# Altium PCB pcbTUESDAY.PcbDoc
Units mil, origin at the board's own origin, x right, y up, seen from the top; angles counter-clockwise.
Board outline 1620 x 1650 mil, 2 copper layers (Top Layer, Bottom Layer); 30 components, 22 nets, 99 pads, 0 vias.
Unrouted connection lines stored in the file: 28.
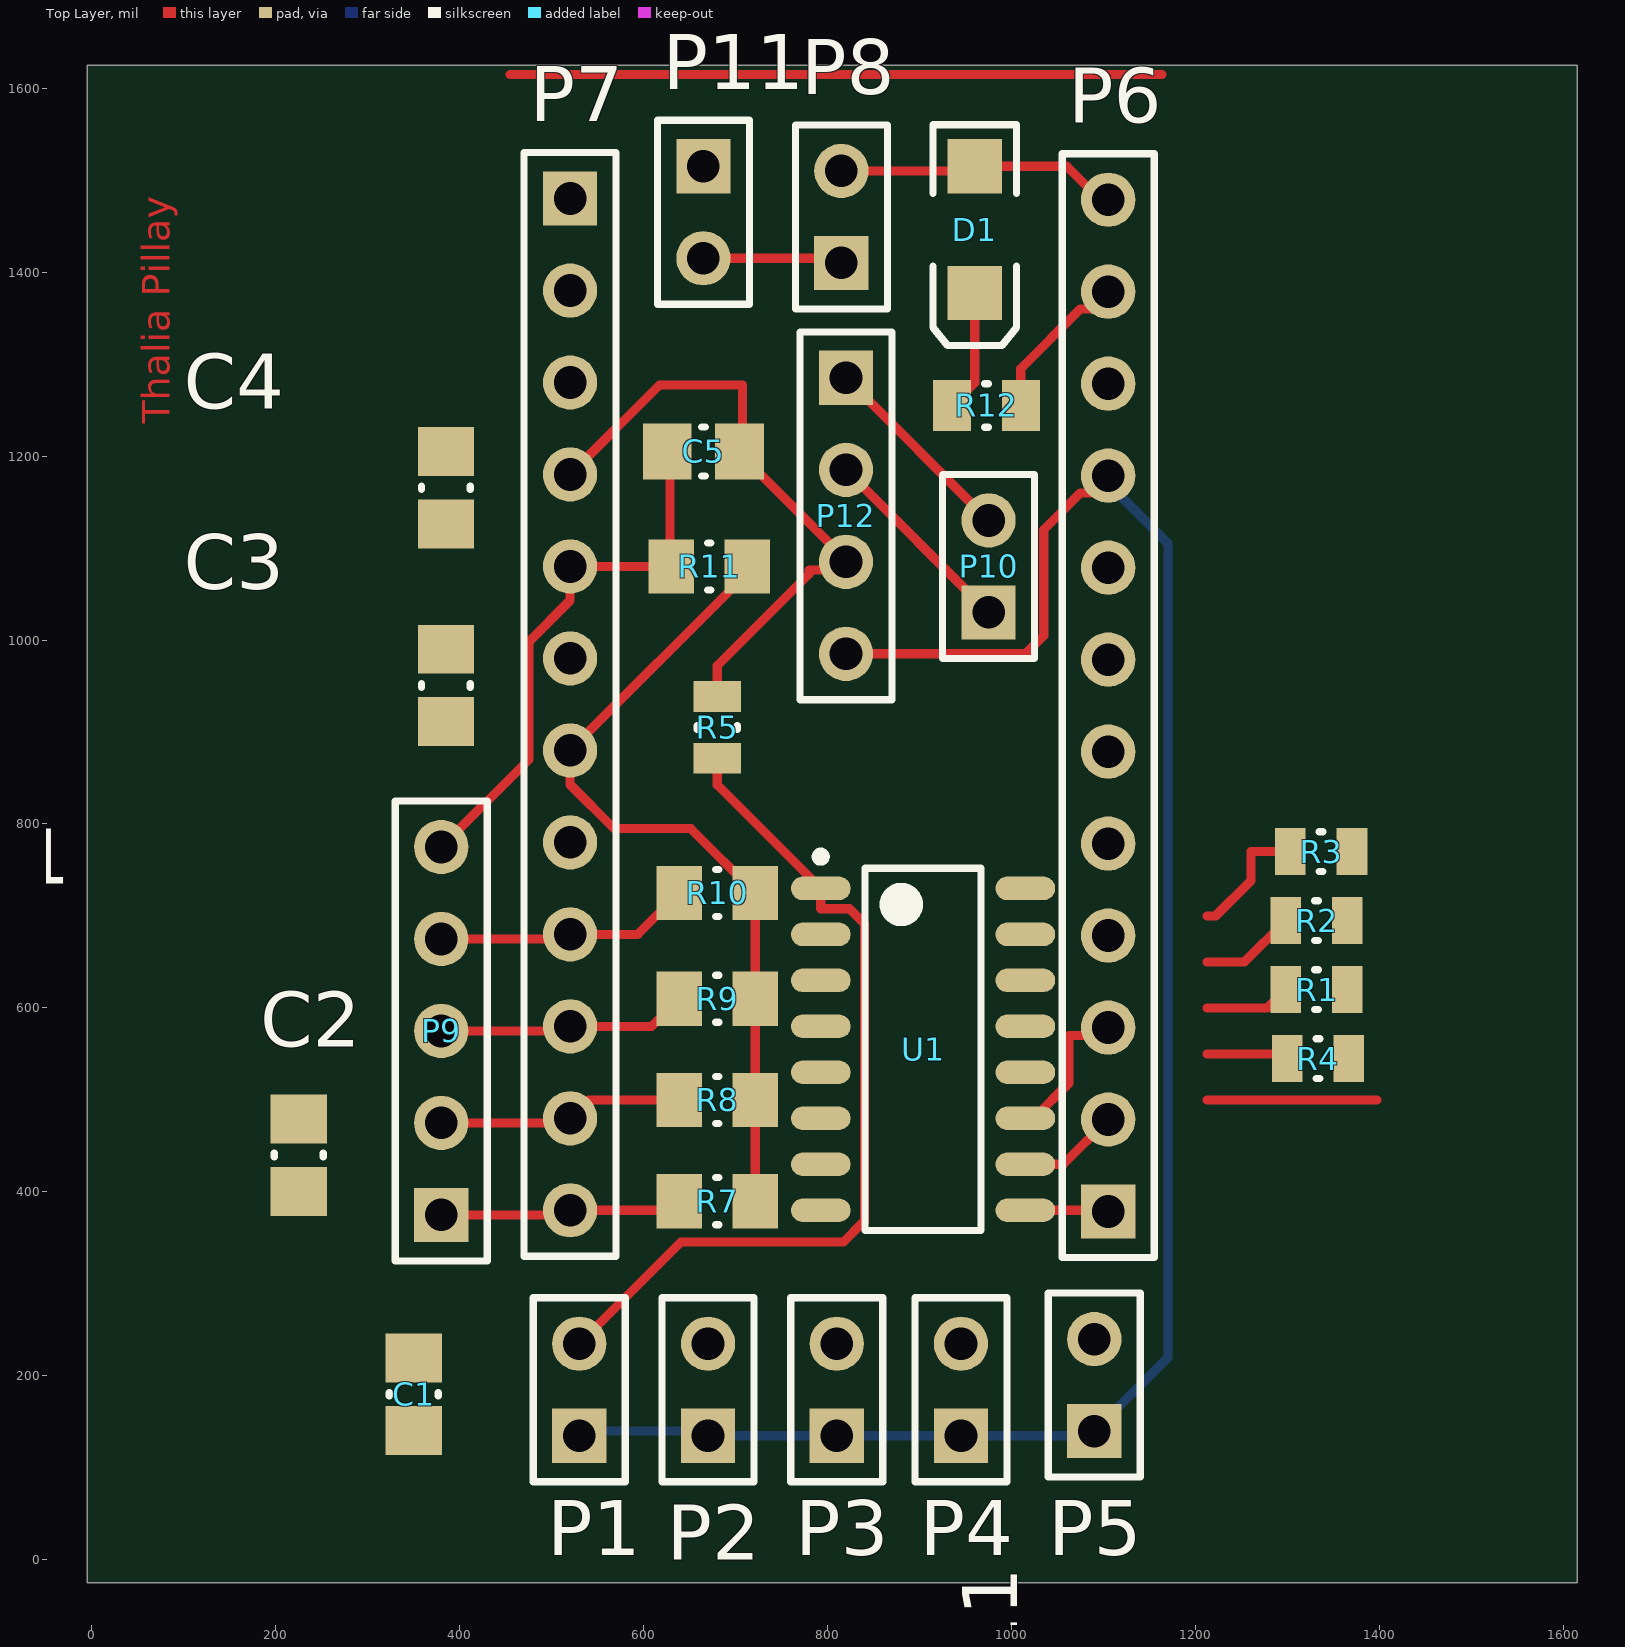
[diagram p0: Top Layer view]
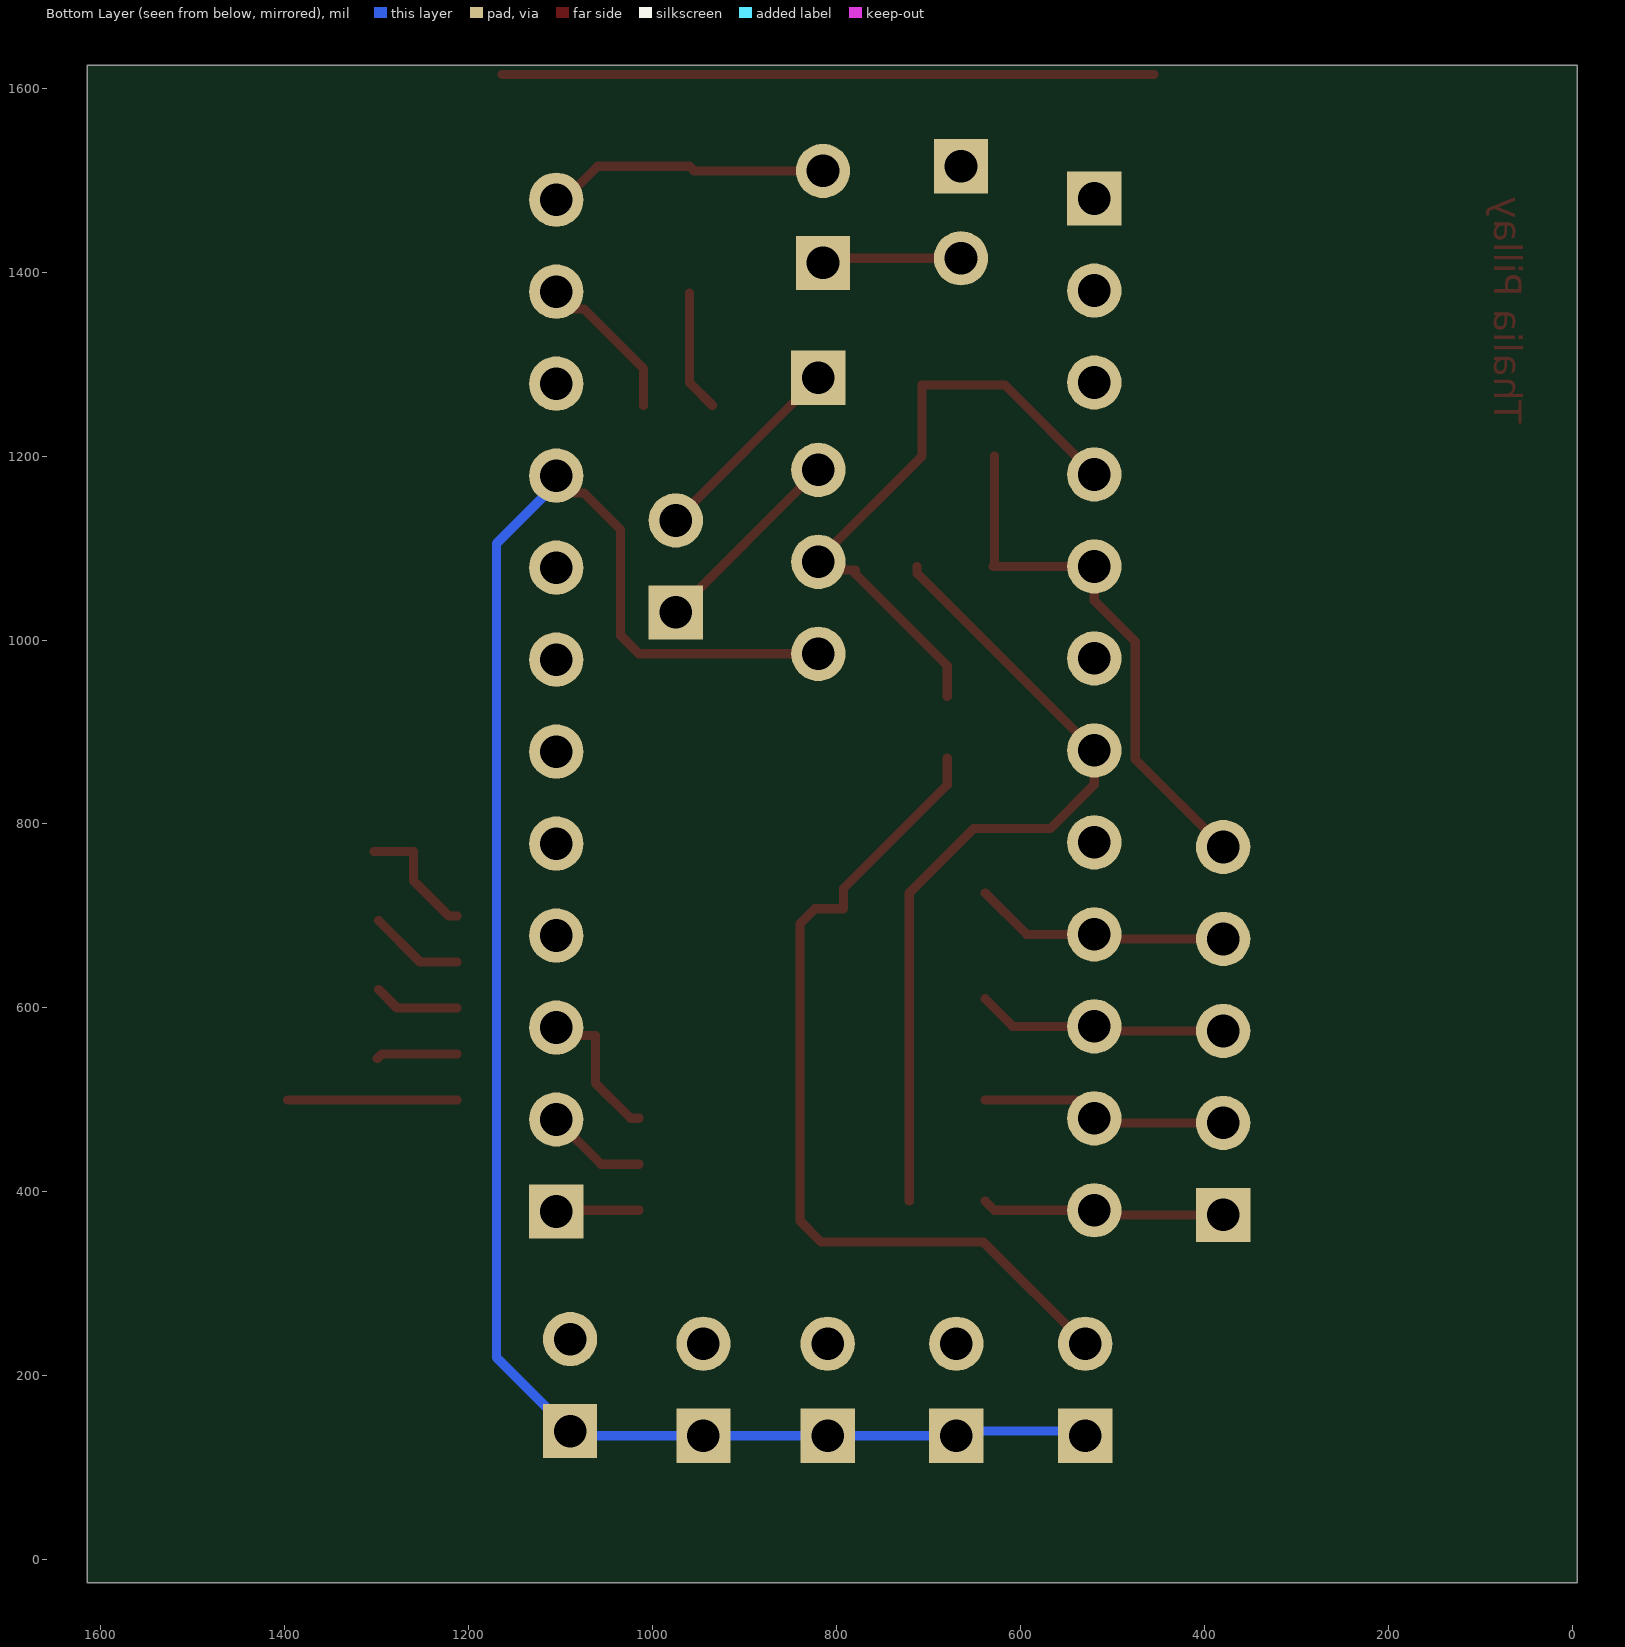
[diagram p1: Bottom Layer view, seen from below]

## Layer stack, top to bottom
Top Solder: solder mask 0.4, Solder Resist, Dk 3.5
Top Layer: signal copper 1.4
Dielectric 1: dielectric 12.6, FR-4, Dk 4.8
Bottom Layer: signal copper 1.4
Bottom Solder: solder mask 0.4, Solder Resist, Dk 3.5

## Board outline
-5,-25 1615,-25 1615,1625 -5,1625

## Design rules (kind name [scope] priority, off if disabled: settings)
Clearance [All] p1: gap=10 ignorepadtopadclearanceinfootprint=FALSE except(0: Arc-Hole Track-Hole SMDPad-Hole THPad-Hole Via-Hole Fill-Hole Poly-Hole Region-Hole Text-Hole)
PolygonConnect [All] p1: connectstyle=Relief reliefconductorwidth=10 reliefentries=4 polygonreliefangle="90 Angle" airgapwidth=10
RoutingVias [All] p1: holewidth=28 width=50 viastyle="Through Hole" minholewidth=28 minwidth=50 maxholewidth=28 maxwidth=50
SolderMaskExpansion [All] p1: expansion=4
Width [All] p1: maxlimit=10 minlimit=10 preferedwidth=10
30 further rules are at their usual default settings.

## Components (designator, comment, footprint, x,y, rotation, side; value= is the part's Value field where it differs from the comment)
C1 "CAP 100pF 10V 0805(2012)" CAPC0805(2012)100_M 350,180 r90 top value=100pF
C2 "CAP 100pF 10V 0805(2012)" CAPC0805(2012)100_M 225,440 r90 top value=100pF
C3 "CAP 100pF 10V 0805(2012)" CAPC0805(2012)100_M 385,950.63 r90 top value=100pF
C4 "CAP 100pF 10V 0805(2012)" CAPC0805(2012)100_M 385,1165.63 r270 top value=100pF
C5 "CAP 100pF 10V 0805(2012)" CAPC0805(2012)100_M 665,1205 r180 top value=100pF
D1 "GREEN" 3.2X1.6X1.1 960,1446.1 r270 top (schematic designator D?)
P1 "pinky" HDR1X2 530,135 r90 top
P2 "ring" HDR1X2 670,135 r90 top
P3 "middle" HDR1X2 810,135 r90 top
P4 "index" HDR1X2 945,135 r90 top
P5 "thumb" HDR1X2 1090,140 r90 top
P6 "Header 12" HDR1X12 1105,378.74 r90 top
P7 "Header 12" HDR1X12 520,1480 r270 top
P8 "TOGGLE" HDR1X2 815,1410 r90 top
P9 "Header 5" HDR1X5 380,375 r90 top
P10 "IMU HEADER" HDR1X2 975,1030 r90 top
P11 "BATTERY" HDR1X2 665,1515 r270 top
P12 "ADAFRUIT BNO055" HDR1X4 820,1285 r270 top
R1 "47K 5% 0805(2012)" RESC0805(2012)_L 1331.54,620 r180 top value="47000.00 Ohm"
R2 "47K 5% 0805(2012)" RESC0805(2012)_L 1331.54,695 r180 top value="47000.00 Ohm"
R3 "47K 5% 0805(2012)" RESC0805(2012)_L 1336.54,770 r180 top value="47000.00 Ohm"
R4 "47K 5% 0805(2012)" RESC0805(2012)_L 1333.07,545 r180 top value="47000.00 Ohm"
R5 "47K 5% 0805(2012)" RESC0805(2012)_L 680,905 r270 top value="47000.00 Ohm"
R7 "10M 5% 0805(2012)" RESC0805(2012)_M 680,390 r0 top value="10000000.00 Ohm"
R8 "10M 5% 0805(2012)" RESC0805(2012)_M 680,500 r0 top value="10000000.00 Ohm"
R9 "10M 5% 0805(2012)" RESC0805(2012)_M 680,610 r0 top value="10000000.00 Ohm"
R10 "10M 5% 0805(2012)" RESC0805(2012)_M 680,725 r0 top value="10000000.00 Ohm"
R11 "10M 5% 0805(2012)" RESC0805(2012)_M 671.34,1080 r0 top value="10000000.00 Ohm"
R12 "240R 5% 0805(2012)" RESC0805(2012)_N 972.6,1255 r180 top value="240.00 Ohm"
U1 "CD4051BM96G3" D0016A_M 903.78,555 r0 top

## Footprints (in the part's own frame and the unit in brackets; to place one, negate y for a bottom-side part, rotate by r counter-clockwise, add the part's x,y. Pads: shape width x height; smd on the part's side, far side on the other; paste and mask are expansions set on the pad)
3.2X1.6X1.1 [mm] "SMT LED; 2 Flat Leads"
  rect 1.5x1.5 smd: 1(-1.75,0) 2(1.75,0)
  silkscreen extent -2.9,-1.15 3.2,1.15
CAPC0805(2012)100_M [mm] "Chip Capacitor, Body 2.0x1.2mm, Height 1.0mm, IPC Low Density"
  rect 1.35x1.55 smd: 1(-1,0) 2(1,0)
  silkscreen extent -0.05,-0.67 0.05,0.67, body extent -1.1,-0.72 1.1,0.72, height 1
D0016A_M [mm] "SOIC, 16-Leads, Body 10x4mm, Pitch 1.27mm, IPC Low Density"
  oval 1.65x0.65 smd: 1(-2.825,4.445) 2(-2.825,3.175) 3(-2.825,1.905) 4(-2.825,0.635) 5(-2.825,-0.635) 6(-2.825,-1.905) 7(-2.825,-3.175) 8(-2.825,-4.445) 9(2.825,-4.445) 10(2.825,-3.175) 11(2.825,-1.905) 12(2.825,-0.635) 13(2.825,0.635) 14(2.825,1.905) 15(2.825,3.175) 16(2.825,4.445)
  silkscreen extent -2.95,-5 1.6,5.44, body extent -3,-4.95 3,4.95, height 1.59
HDR1X2 [mm] "Connector; Header; 2 Position"
  rect 1.5x1.5 hole 0.9: 1(0,0)
  round 1.5 hole 0.9: 2(2.54,0)
  silkscreen extent -1.27,-1.27 3.81,1.27
HDR1X4 [mm] "Connector; Header; 4 Position"
  rect 1.5x1.5 hole 0.9: 1(0,0)
  round 1.5 hole 0.9: 2(2.54,0) 3(5.08,0) 4(7.62,0)
  silkscreen extent -1.27,-1.27 8.89,1.27
HDR1X5 [mm] "Connector; Header; 5 Position"
  rect 1.5x1.5 hole 0.9: 1(0,0)
  round 1.5 hole 0.9: 2(2.54,0) 3(5.08,0) 4(7.62,0) 5(10.16,0)
  silkscreen extent -1.27,-1.27 11.43,1.27
HDR1X12 [mm] "Connector; Header; 12 Position"
  rect 1.5x1.5 hole 0.9: 1(0,0)
  round 1.5 hole 0.9: 2(2.54,0) 3(5.08,0) 4(7.62,0) 5(10.16,0) 6(12.7,0) 7(15.24,0) 8(17.78,0) 9(20.32,0) 10(22.86,0) 11(25.4,0) 12(27.94,0)
  silkscreen extent -1.27,-1.27 29.21,1.27
RESC0805(2012)_L [mm] "Chip Resistor, Body 2.0x1.3mm, IPC High Density"
  rect 0.85x1.3 smd: 1(-0.85,0) 2(0.85,0)
  silkscreen extent -0.05,-0.55 0.05,0.55, body extent -1.1,-0.67 1.1,0.68, height 0.7
RESC0805(2012)_M [mm] "Chip Resistor, Body 2.0x1.3mm, IPC Low Density"
  rect 1.25x1.5 smd: 1(-1.05,0) 2(1.05,0)
  silkscreen extent -0.05,-0.65 0.05,0.65, body extent -1.1,-0.67 1.1,0.67, height 0.7
RESC0805(2012)_N [mm] "Chip Resistor, Body 2.0x1.3mm, IPC Medium Density"
  rect 1.05x1.4 smd: 1(-0.95,0) 2(0.95,0)
  silkscreen extent -0.05,-0.6 0.05,0.6, body extent -1.1,-0.67 1.1,0.68, height 0.7

## Part data
C1 C2 C3 C4 C5: library part CMP-1036-01932-1, "CAP 100pF 10V ±5% 0805 (2012 Metric) Thickness 1mm SMD", Case-EIA=0805, Case-Metric=2012, Rated Voltage="10 V", Tolerance=±5%, Max Thickness="1 mm", Technology=SMT
D1: library part LED2, "Typical RED, GREEN, YELLOW, AMBER GaAs LED", LatestRevisionDate=17-Jul-2002, LatestRevisionNote="Re-released for DXP Platform.", PackageDescription="SM LED; 2 Flat Leads", PackageReference=3.2X1.6X1.1, PackageVersion=Feb-2002, Published=8-Jun-2000, Publisher="Altium Limited"
P1 P2 P3 P4 P5 P8 P10 P11: library part "Header 2", "Header, 2-Pin", LatestRevisionDate=17-Jul-2002, LatestRevisionNote="Re-released for DXP Platform.", Publisher="Altium Limited"
P6 P7: "Header, 12-Pin", LatestRevisionDate=17-Jul-2002, LatestRevisionNote="Re-released for DXP Platform.", Publisher="Altium Limited"
P9: "Header, 5-Pin", LatestRevisionDate=17-Jul-2002, LatestRevisionNote="Re-released for DXP Platform.", Publisher="Altium Limited"
P12: library part "Header 4", "Header, 4-Pin", LatestRevisionDate=17-Jul-2002, LatestRevisionNote="Re-released for DXP Platform.", Publisher="Altium Limited"
R1 R2 R3 R4 R5: library part CMP-1013-00114-1, "47K 0.125W 5% 0805 (2012 Metric)  SMD", Case-EIA=0805, Case-Metric=2012, Power="0.125 W", Tolerance="5 %", Technology=SMT
R7 R8 R9 R10 R11: library part CMP-1013-00170-1, "10M 0.125W 5% 0805 (2012 Metric)  SMD", Case-EIA=0805, Case-Metric=2012, Power="0.125 W", Tolerance="5 %", Technology=SMT
R12: library part CMP-1013-00059-1, "240R 0.125W 5% 0805 (2012 Metric)  SMD", Case-EIA=0805, Case-Metric=2012, Power="0.125 W", Tolerance="5 %", Technology=SMT
U1: library part CMP-1575-00039-2, "CMOS Single 8-Channel Analog Multiplexer/Demultiplexer with Logic-Level Conversion, D0016A, LARGE T&R", Operating Temperature Range(C)="-55 to 125", Part Number=CD4051B, Rating=Military, Bandwidth(Max)(MHz)=20, Code_IPC="MS-012 variation AC", ComponentLink1Description="Manufacturer URL", ComponentLink1URL=http://www.ti.com/, ComponentLink2Description=Datasheet, ComponentLink2URL=http://www.ti.com/lit/ds/symlink/cd4051b.pdf, Configuration="1 X 1:8 MUX", Crosstalk=Yes, DatasheetVersion=SCHS047G, ICC(Typ)(mA)=0.00008, Output Drive (IOL/IOH)(Max)(mA)=1, Output Type=CMOS, PackageReference=D0016A, PackageVersion=http://www.ti.com/lit/ml/mpds178g/mpds178g.pdf, PartNumber=CD4051BM96G3, Ron(Max)(Ohms)=240, Ron(Typ)(Ohms)=125, VCC(Max)(V)=18, VCC(Min)(V)=5

## Nets (pads, with @x,y where several pads share a name; then routed paths per layer and width w, separated by ;. In a path a pad name is that pad's centre, name@x,y a point inside that pad or via, vN(x,y) a via of type N, cw(c..) or ccw(c..) an arc to the next point about the centre after c; other vN are vias at no path point)
A0: P6.5 U1.3
A4: P10.1 P12.2 | length 219.2
  Top Layer w10: P12.2 P10.1
A5: P10.2 P12.1 | length 219.2
  Top Layer w10: P12.1 P10.2
GND: C1.1 C2.1 C3.1 C4.1 C5.1 P6.11 P7.4 P11.1 P12.3 R1.1 R2.1 R3.1 R4.1 R5.1 R12.1 U1.6 U1.7 U1.8 | length 859.3
  Top Layer w10: P7.4 617.4,1277.4 707.4,1277.4 707.4,1200 820,1087.4 P12.3 811.17,1076.17 780,1076.17 780,1071.98 680,971.98 R5.1 ; R12.1 1010,1295 1075,1360 1086.26,1360 P6.11
NetD?_2: D1.2 R12.2 | length 132.5
  Top Layer w10: R12.2 960,1279.8 D1.2
NetP1_2: P1.2 R5.2 U1.1 | length 952.9
  Top Layer w10: P1.2 640.47,345.47 817.02,345.47 840.04,368.49 840.04,691.51 823.76,707.8 792.56,707.8 U1.1 680,842.56 R5.2
NetP2_2: P2.2 R4.2 U1.12 | length 88.9
  Top Layer w10: 1212.76,550 1294.61,550 R4.2
NetP3_2: P3.2 R3.2 U1.15 | length 137.8
  Top Layer w10: 1212.76,700 1221.75,700 1260.24,738.49 1260.24,770 R3.2
NetP4_2: P4.2 R2.2 U1.14 | length 104
  Top Layer w10: 1212.76,650 1253.07,650 R2.2
NetP5_2: P5.2 R1.2 U1.13 | length 93.6
  Top Layer w10: 1212.76,600 1278.07,600 R1.2
NetP8_1: P8.1 P11.2 | length 152.1
  Top Layer w10: P11.2 810,1415 P8.1
PIN2: C5.2 P7.5 P9.5 R11.1 | length 593.5
  Top Layer w10: P9.5 475.47,870.47 475.47,998.44 520,1042.97 P7.5 R11.1 628.66,1081.34 C5.2@628.66,1200
PIN4: P7.7 R7.2 R8.2 R9.2 R10.2 R11.2 | length 902
  Top Layer w10: R11.2 712.68,1072.68 P7.7 520,842.97 567.97,795 651.34,795 R10.2 R9.2 R8.2 R7.2
PIN6: C4.2 P7.9 P9.4 R10.1 | length 279.4
  Top Layer w10: P9.4 515,675 P7.9 593.66,680 R10.1
PIN7: C3.2 P7.10 P9.3 R9.1 | length 273.2
  Top Layer w10: P9.3 515,575 P7.10 608.66,580 R9.1
PIN8: C2.2 P7.11 P9.2 R8.1 | length 269
  Top Layer w10: P9.2 515,475 P7.11 540,500 R8.1
PIN9: C1.2 P7.12 P9.1 R7.1 | length 264.9
  Top Layer w10: P9.1 515,375 P7.12 628.66,380 R7.1
PIN10: P6.1 U1.9 | length 90.5
  Top Layer w10: U1.9 1103.74,380 P6.1
PIN11: P6.2 U1.10 | length 115.2
  Top Layer w10: U1.10 1056.26,430 P6.2 ; P6.2@1090,480 P6.2@1095,480
PIN12: P6.3 U1.11 | length 350.4
  Top Layer w10: U1.11 1023.99,480 1062.48,518.49 1062.48,570 1105,570 P6.3 ; 1212.76,500 1397,500
RAW: D1.1 P6.12 P8.2 | length 307.1
  Top Layer w10: P8.2 955,1510 D1.1 1060,1515 1096.26,1478.74 P6.12
VCC: P1.1 P2.1 P3.1 P4.1 P5.1 P6.9 P12.4 U1.16 | length 2106
  Top Layer w10: P12.4 1015,985 1035,1005 1035,1120 1075,1160 1086.26,1160 P6.9
  Bottom Layer w10: P1.1@525,140 665,140 P2.1 P3.1 P4.1 1085,135 P5.1 1170,220 1170,1105 P6.9@1095,1180
pads on no net: P6.4 P6.6 P6.7 P6.8 P6.10 P7.1 P7.2 P7.3 P7.6 P7.8 U1.2 U1.4 U1.5
copper on no net: | length 708.7
  Top Layer w10: 455,1615 1163.66,1615

## Other copper
Top Layer:
  text "Thalia Pillay" at 85,1235 h30 r90